# Altium PCB PCB1.PcbDoc
Units mil, origin at the board's own origin, x right, y up, seen from the top; angles counter-clockwise.
Board outline 1240 x 760 mil, 2 copper layers (Top Layer, Bottom Layer); 9 components, 8 nets, 32 pads, 8 vias.
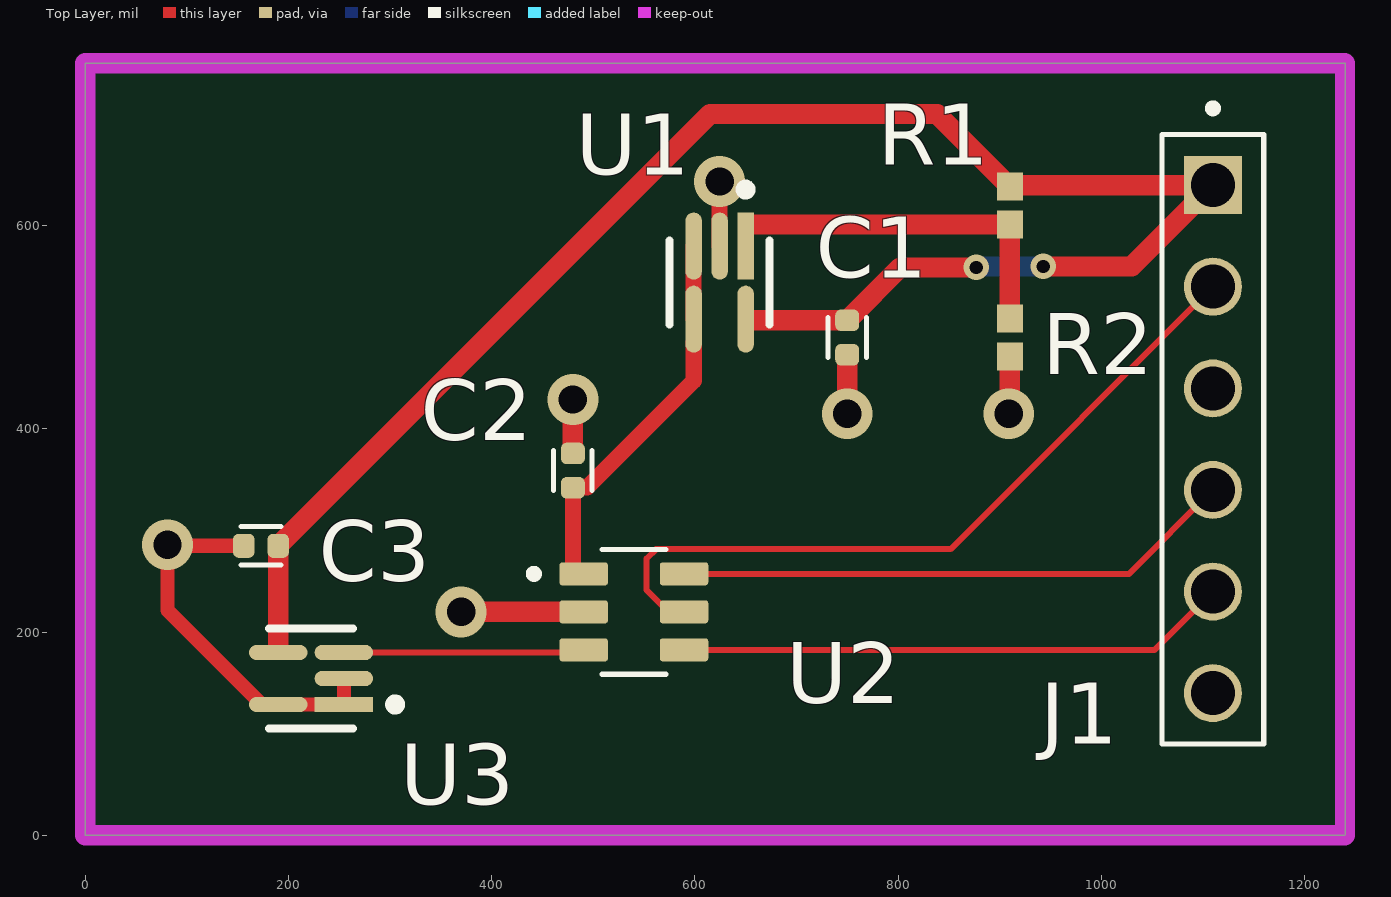
[diagram p0: Top Layer view]
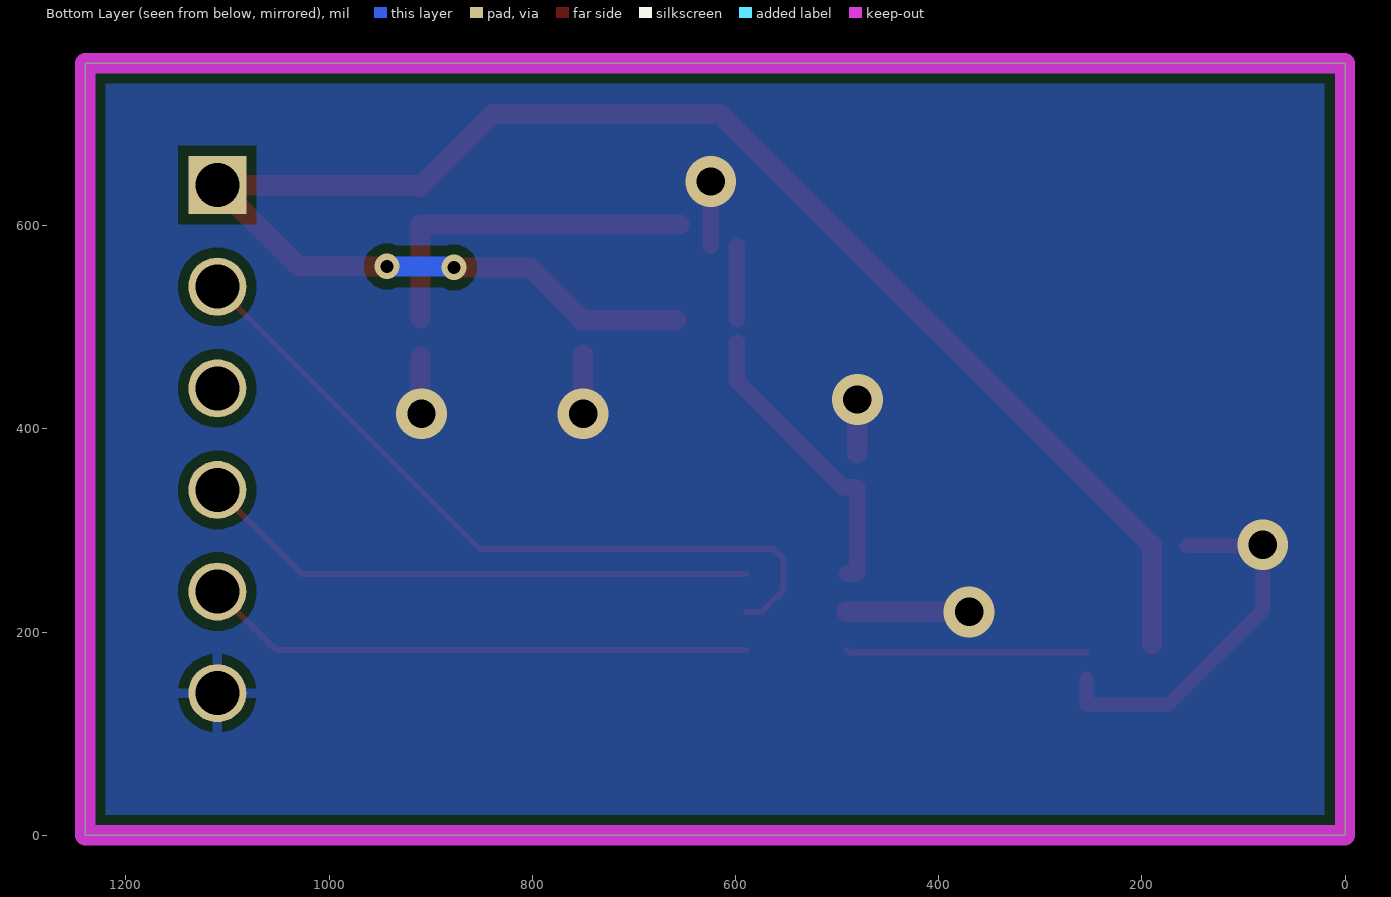
[diagram p1: Bottom Layer view, seen from below]
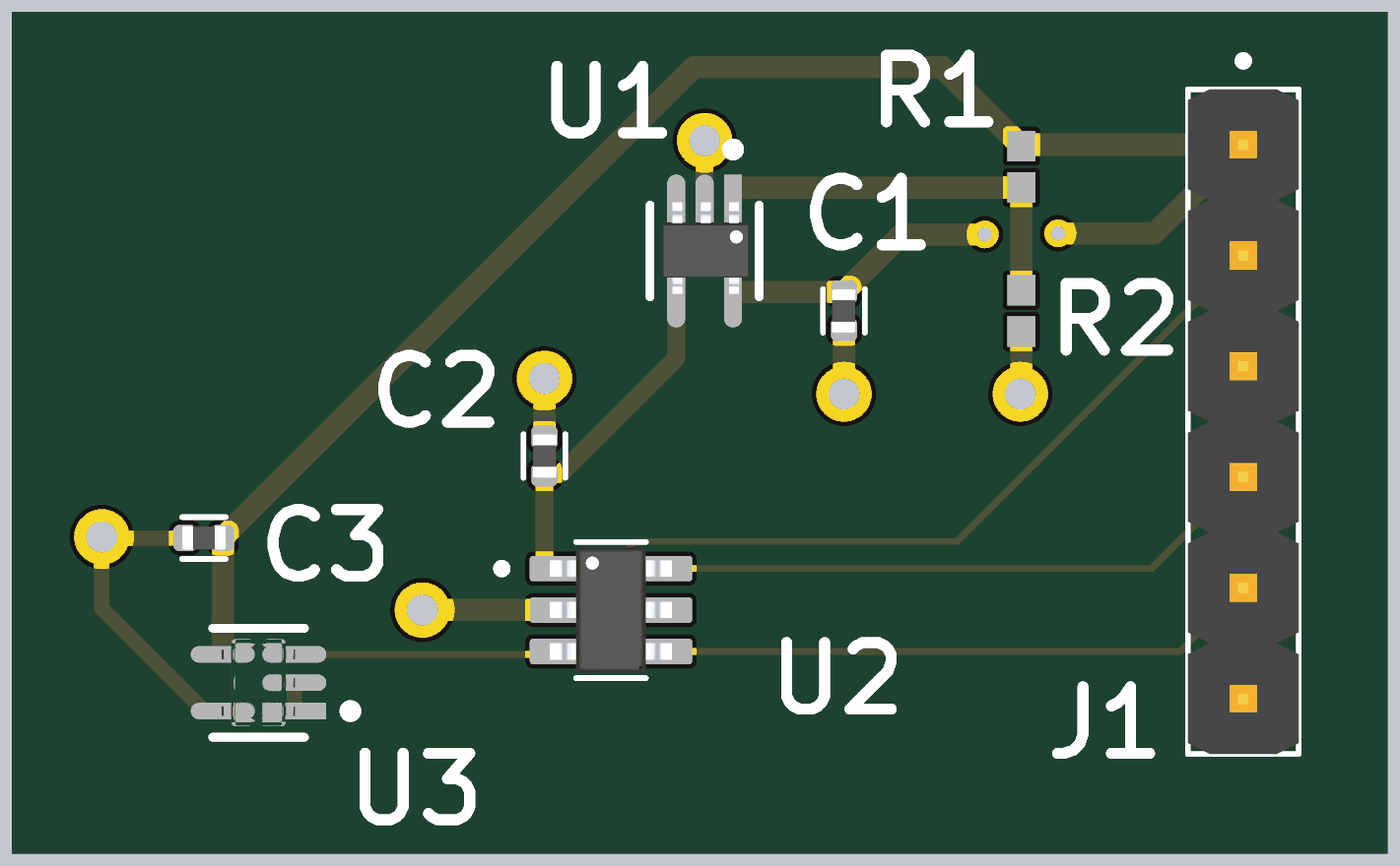
[diagram p2: 3D render of the assembled board from above, using the file's embedded part models]

## Layer stack, top to bottom
Top Solder: solder mask 0.4, Solder Resist, Dk 3.5
Top Layer: signal copper 1.4
Dielectric 1: dielectric 12.6, FR-4, Dk 4.8
Bottom Layer: signal copper 1.4
Bottom Solder: solder mask 0.4, Solder Resist, Dk 3.5

## Board outline
0,760 1240,760 1240,0 0,0

## Design rules (kind name [scope] priority, off if disabled: settings)
BoardOutlineClearance [All] p1: gap=10 ignorepadtopadclearanceinfootprint=FALSE except(0: Arc-SplitContinuation Track-SplitContinuation SMDPad-SplitContinuation THPad-SplitContinuation Via-SplitContinuation Fill-SplitContinuation Poly-SplitContinuation Region-SplitContinuation Text-SplitContinuation)
Clearance [All] p1: gap=10 ignorepadtopadclearanceinfootprint=FALSE except(0: Arc-Hole Track-Hole SMDPad-Hole THPad-Hole Via-Hole Fill-Hole Poly-Hole Region-Hole Text-Hole)
PlaneClearance [All] p1: clearance=10
PlaneConnect [All] p1: planeconnectstyle=Direct reliefexpansion=20 reliefentries=4 reliefconductorwidth=10 reliefairgap=10
PolygonConnect [All] p1: thpad.connectstyle=Relief thpad.reliefconductorwidth=10 thpad.reliefentries=4 thpad.polygonreliefangle="90 Angle" thpad.airgapwidth=10 smdpad.connectstyle=Direct smdpad.reliefconductorwidth=10 smdpad.reliefentries=4 smdpad.polygonreliefangle="90 Angle" smdpad.airgapwidth=10 via.connectstyle=Direct via.reliefconductorwidth=10 via.reliefentries=4 via.polygonreliefangle="90 Angle" via.airgapwidth=10
RoutingVias [All] p1: holewidth=13 width=25 viastyle="Through Hole" minholewidth=13 minwidth=25 maxholewidth=60 maxwidth=80
SolderMaskExpansion [All] p1: expansion=4 istentingtop=FALSE
UnRoutedNet [All] p1: checkbadconnections=TRUE
Width "Schematic Width Constraint_5" [InNet('GND')] p1: maxlimit=100 minlimit=10 preferedwidth=20 minimp=50.000000 maximp=50.000000 favimp=50.000000
Width "Schematic Width Constraint_4" [InNet('+5')] p2: maxlimit=100 minlimit=10 preferedwidth=20 minimp=50.000000 maximp=50.000000 favimp=50.000000
Width "Schematic Width Constraint_3" [InNet('MISO')] p3: maxlimit=10 minlimit=6 preferedwidth=6 minimp=50.000000 maximp=50.000000 favimp=50.000000
Width "Schematic Width Constraint_2" [InNet('SCLK')] p4: maxlimit=10 minlimit=6 preferedwidth=6 minimp=50.000000 maximp=50.000000 favimp=50.000000
Width "Schematic Width Constraint_1" [InNet('\C\S\')] p5: maxlimit=10 minlimit=6 preferedwidth=6 minimp=50.000000 maximp=50.000000 favimp=50.000000
Width "Schematic Width Constraint" [InNet('NetU2_3')] p6: maxlimit=10 minlimit=6 preferedwidth=6 minimp=50.000000 maximp=50.000000 favimp=50.000000
Width [All] p7: maxlimit=100 minlimit=6 preferedwidth=6 minimp=50.000000 maximp=50.000000 favimp=50.000000
27 further rules are at their usual default settings.

## Components (designator, comment, footprint, x,y, rotation, side; value= is the part's Value field where it differs from the comment)
C1 "CC0402ZRY5V7BB104" CAPC1005X55N 750,490 r270 top value="0.1 µF"
C2 "CC0402ZRY5V7BB104" CAPC1005X55N 480,359 r90 top value="0.1 µF"
C3 "CC0402ZRY5V7BB104" CAPC1005X55N 173,285 r180 top value="0.1 µF"
J1 "61300611121" CON-WURTH_61300611121 1110,390 r270 top
R1 "RC0402FR-071K13L" RESC1005X40X25ML05T10 910,620 r90 top value="1130 Ω"
R2 "RC0402FR-071K33L" RESC1005X40X25ML05T10 910,490 r270 top value="1330 Ω"
U1 "LM321LVIDCKR" FP-DCK0005A-IPC_A 624.41,544.03 r270 top
U2 "ADC101S021CIMF" ADC-SOT95P280X145-6N 540,220 r0 top
U3 "TMP235A2DCKR" TMP-FP-DCK0005A-IPC_B 222.29,154.41 r180 top

## Footprints (in the part's own frame and the unit in brackets; to place one, negate y for a bottom-side part, rotate by r counter-clockwise, add the part's x,y. Pads: shape width x height; smd on the part's side, far side on the other; paste and mask are expansions set on the pad)
ADC-SOT95P280X145-6N [mm]
  rrect25% 1.21x0.58 smd: 1(-1.255,0.95) 2(-1.255,0) 3(-1.255,-0.95) 4(1.255,-0.95) 5(1.255,0) 6(1.255,0.95)
  silkscreen extent -2.6,-1.56 0.8,1.56, body extent -1.4,-1.45 1.4,1.45, height 1.31
CAPC1005X55N [mm]
  rrect53% 0.54x0.6 smd: 1(-0.43,0) 2(0.43,0)
  silkscreen extent -0.5,-0.48 0.5,0.48, body extent -0.5,-0.28 0.5,0.27, height 0.51
CON-WURTH_61300611121 [mm]
  rect 1.45x1.45 / inner round 1.45 / far side rect 1.45x1.45 hole 1.1: 01(-6.35,0)
  round 1.45 hole 1.1: 02(-3.81,0) 03(-1.27,0) 04(1.27,0) 05(3.81,0) 06(6.35,0)
  silkscreen extent -8.37,-1.27 7.62,1.27, body extent -7.62,-1.27 7.62,1.27, height 8.55
FP-DCK0005A-IPC_A [mm]
  rect 1.677x0.416 smd paste+0 mask+0: 1(-0.914,0.65)
  rrect100% 1.677x0.416 smd paste+0 mask+0: 2(-0.914,0) 3(-0.914,-0.65) 4(0.914,-0.65) 5(0.914,0.65)
  silkscreen extent -2.45,-1.25 1.05,1.25, body extent -1.12,-0.97 1.05,1.03, height 1.11
RESC1005X40X25ML05T10 [mm] "Chip Resistor, 2-Leads, Body 1.00x0.50mm, IPC Low Density"
  rect 0.7x0.65 smd: 1(-0.475,0) 2(0.475,0)
  body extent -0.53,-0.27 0.53,0.28, height 0.4
TMP-FP-DCK0005A-IPC_B [mm]
  rect 1.464x0.376 smd paste+0 mask+0: 1(-0.82,0.65)
  rrect100% 1.464x0.376 smd paste+0 mask+0: 2(-0.82,0) 3(-0.82,-0.65) 4(0.82,-0.65) 5(0.82,0.65)
  silkscreen extent -2.23,-1.25 1.05,1.25, body extent -1.8,-1.25 1.8,1.25, height 0.25

## Part data
C1 C2 C3: "0.1ÂµF -20%, +80% 16V Ceramic Capacitor Y5V (F) 0402 (1005 Metric)", Package="0402 Yageo", Digi-Key_Part_Number=311-1047-1-ND, MF=Yageo, MP=CC0402ZRY5V7BB104, SnapEDA_Link=https://www.snapeda.com/parts/CC0402ZRY5V7BB104/Yageo/view-part/1821018/?ref=snap
J1: "Board Connector, 48 Contact(s), 1 Row(s), Male, Straight, 0.1 inch Pitch, Solder Terminal, Black Insulator", Insulation Color=Black, Manufacturer=Samtec, Manufacturer Part Number=TS-108-T-A, Manufacturer Series=TS, Max Operating Temperature=105°C, Min Operating Temperature=-55°C, Package=None, Body Breadth=0.1inch, Body Length=0.8inch, Category=Connectors, Check_prices=https://www.snapeda.com/parts/61300611121/Wurth+Electronics+Inc./view-part/?ref=eda, ComponentLink1Description=https://datasheet.ciiva.com:443/pdfs/VipMasterIC/IC/SAMI/SAMI-S-A0001504555/SAMI-S-A0001504555-1.pdf?src-supplier=IHS+Markit, ComponentLink1URL=https://datasheet.ciiva.com:443/pdfs/VipMasterIC/IC/SAMI/SAMI-S-A0001504555/SAMI-S-A0001504555-1.pdf?src-supplier=IHS+Markit, ComponentLink2Description=https://datasheet.ciiva.com/410/tx-1xx-x-x-mkt1-410208.pdf?src-supplier=Digi-Key, ComponentLink2URL=https://datasheet.ciiva.com/410/tx-1xx-x-x-mkt1-410208.pdf?src-supplier=Digi-Key, Connector Type="BOARD CONNECTOR", Contact Finish - Mating="TIN OVER COPPER (100)", Contact Finish - Termination="TIN OVER COPPER (100)", Contact Gender=Male, Contact Material=Brass, Contact Pattern=RECTANGULAR, Contact Style="RND PIN-SKT", DIN Conformance=No, Filter Feature=No, IEC Conformance=No, Insulation Material=Glass, JESD-609 Code=e3, Mating Contact Pitch=0.1inch, Mating Information="MULTIPLE MATING PARTS AVAILABLE", MF="Wurth Electronics", MIL Conformance=No, Mixed Contacts=No, Mounting Style=STRAIGHT, Mounting Technology=Board, MP=61300611121, Number Of Connectors=1, Number of Contacts=48, Number Of PCB Rows=1, Number of Rows Loaded=1, Option="General Purpose", PCB Contact Pattern=RECTANGULAR, Plating Thickness=200uin, Pricing 1="1=1.5, 50=1.17, 100=0.94, 500=0.8, 1000=0.64, 2000=0.58, 5000=0.47 (USD)", Reach SVHC Compliant=No, Reference Standard=UL, Reliability=COMMERCIAL, RoHS=Yes, RoHS Compliant=Yes, SnapEDA_Link=https://www.snapeda.com/parts/61300611121/Wurth+Electronics+Inc./view-part/?ref=snap, Stock 1=10, Supplier 1="Arrow Electronics", Supplier Part Number 1=TS-108-T-A, Terminal Length=0.156inch, Terminal Pitch=2.54mm, Termination=Solder
R1: library part CMP-1011-00515-2, Manufacturer=Yageo, Part Number=RC0402FR-071K13L
R2: library part CMP-2002-07457-1, Manufacturer=Yageo, Part Number=RC0402FR-071K33L
U1: library part CMP-04895-000147-1, "IC OPAMP GP 1 CIRCUIT SC70-5", RoHS Compliant=Yes
U2: Package=None, Availability=Unavailable, MF="{'manufacturer': u'Texas Instruments'}", MP=ADC101S021CIMFX/NOPB, Price=None
U3: library part CMP-04948-000100-1, "SENSOR ANALOG -40C-150C SC70-5", Max Operating Temperature=150°C, Min Operating Temperature=-40°C, Interface=Analog, Mount="Surface Mount", Output Type="Analog Voltage", Packaging="Tape and Reel", RoHS Compliant=Yes

## Via types
v1: diameter 50, hole 28, Top Layer to Bottom Layer, 6 vias
v2: diameter 25, hole 13, Top Layer to Bottom Layer, 2 vias

## Nets (pads, with @x,y where several pads share a name; then routed paths per layer and width w, separated by ;. In a path a pad name is that pad's centre, name@x,y a point inside that pad or via, vN(x,y) a via of type N, cw(c..) or ccw(c..) an arc to the next point about the centre after c; other vN are vias at no path point)
+5: C1.1 C3.1 J1.01 R1.2 U1.5 U3.4 | length 1732.7
  Top Layer w20: C3.1 189.93,286.18 190.56,286.81 191.74,286.81 614.93,710 838.7,710 906.22,642.48 907.2,642.48 910,639.69 R1.2 ; 190,188 C3.1@190,284.93 ; U1.5@658,506.93 C1.1 751.18,506.93 751.81,507.56 751.81,508.74 802.07,559 v2(877,559) ; R1.2@909.61,638.31 R1.2 ; v2(943,560) 1030,560 J1.01 911.3,640 R1.2
  Bottom Layer w20: v2(877,559) 877.96,559.96 881.49,559.96 881.54,560 v2(943,560)
\C\S\: J1.04 U2.6 | length 554.8
  Top Layer w6: U2.6 1027.4,257.4 J1.04
GND: C1.2 C2.2 C3.2 J1.06 R2.2 U1.2 U2.2 U3.1 U3.2 U3.5 | length 729.5
  Top Layer w14: C3.2 82,285 v1(81,286) 81,221.6 173.78,128.82 U3.5 U3.1 U3.2
  Top Layer w16: U1.2 v1(624.41,643.59)
  Top Layer w20: v1(370,220) U2.2 ; C2.2 v1(480,429) ; v1(750,415) C1.2 ; v1(909,415) 910,416 R2.2
MISO: J1.02 U2.5 | length 745
  Top Layer w6: U2.5 574,220 552.59,241.41 552.59,272.53 561.88,281.82 851.82,281.82 J1.02
NetC2_1: C2.1 U1.3 U1.4 U2.1 | length 366.5
  Top Layer w16: U2.1 481.42,257.4 480,258.82 C2.1 480.63,342.7 494.2,342.7 598.84,447.35 U1.4@598.84,485.05 ; U1.4 U1.3
NetR1_1: R1.1 R2.1 U1.1 | length 347.6
  Top Layer w20: U1.1@655,601.3 R1.1 R2.1
NetU2_3: U2.3 U3.3 | length 237.1
  Top Layer w6: U3.3 487.99,180 U2.3
SCLK: J1.05 U2.4 | length 544.4
  Top Layer w6: U2.4 1052.6,182.6 J1.05
pads on no net: J1.03

## Polygon pours and split planes (outlines as drawn)
GND on Bottom Layer "GND_L02_P000" (solid, pour order 0): 4.45,755.74 8.71,760 1240,760 1240,0 0,0 0,760

## Keep-outs
Keep-Out Layer:
  the board outline again, w20